# Altium PCB SwarmBots.PcbDoc
Units mm, origin at the board's own origin, x right, y up, seen from the top; angles counter-clockwise.
Board outline 23.94 x 24 mm, 4 copper layers (Component Side, Ground Plane, Power Plane, Solder Side), stack 1.1 mm thick; 89 components, 69 nets, 340 pads, 81 vias.
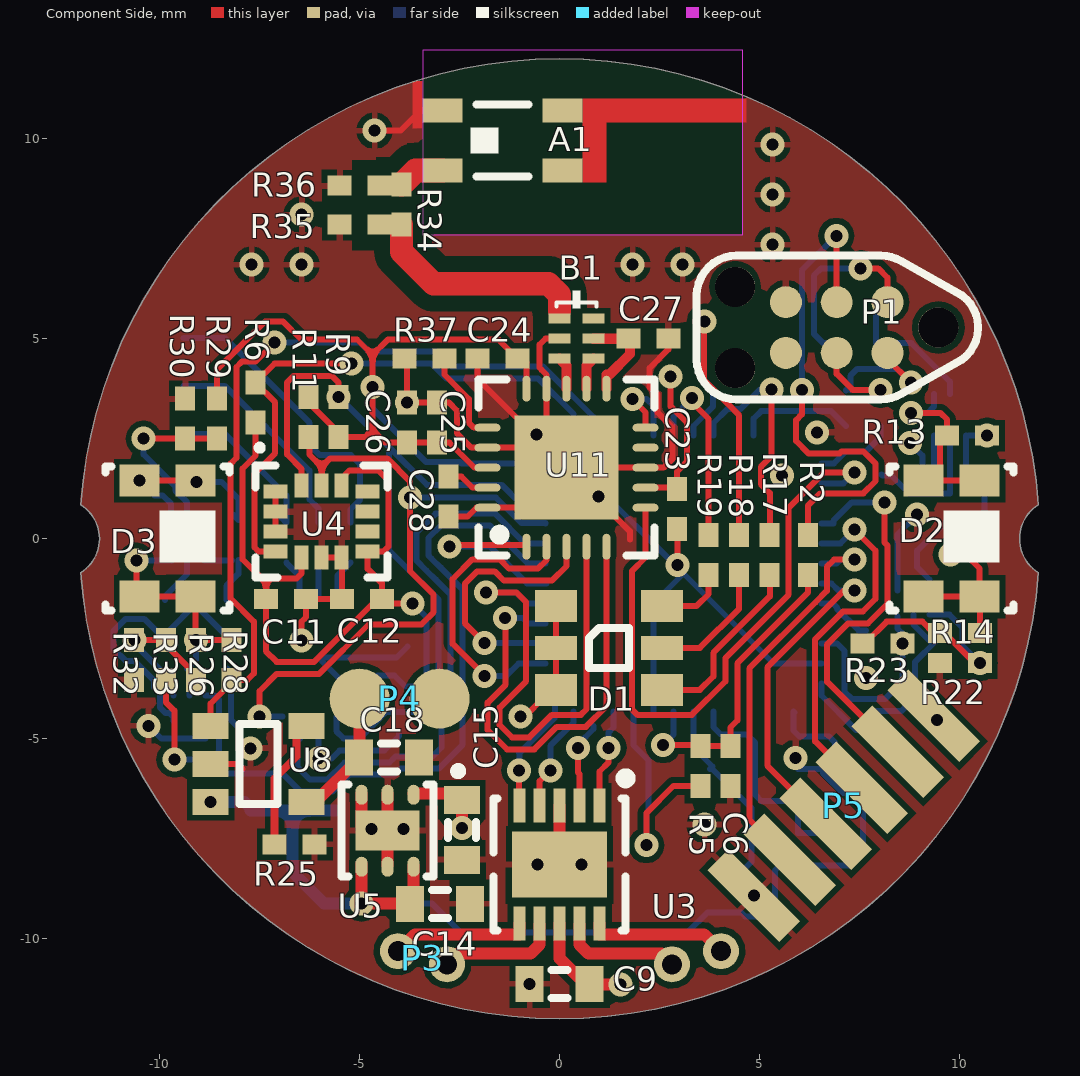
[diagram p0: Component Side view]
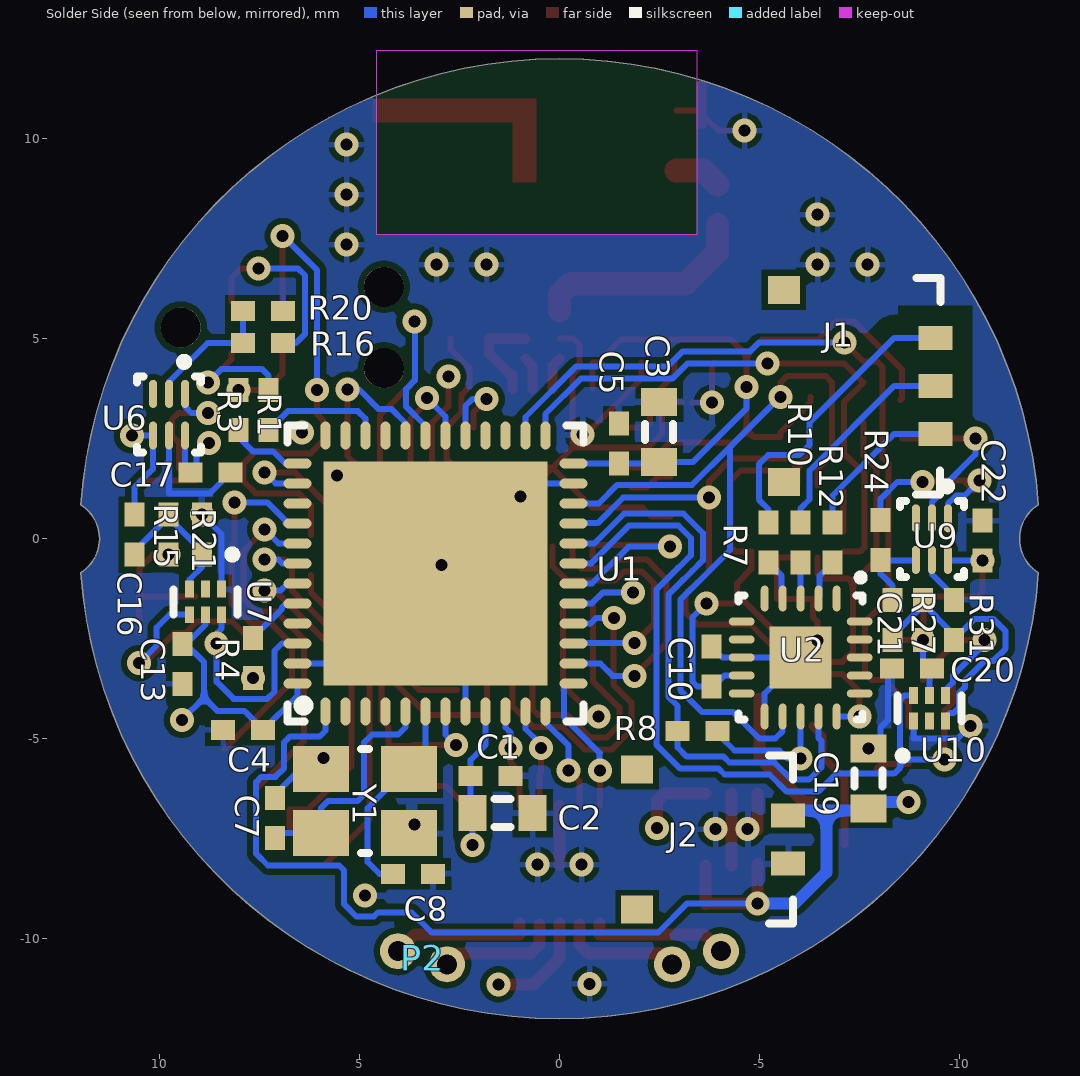
[diagram p1: Solder Side view, seen from below]
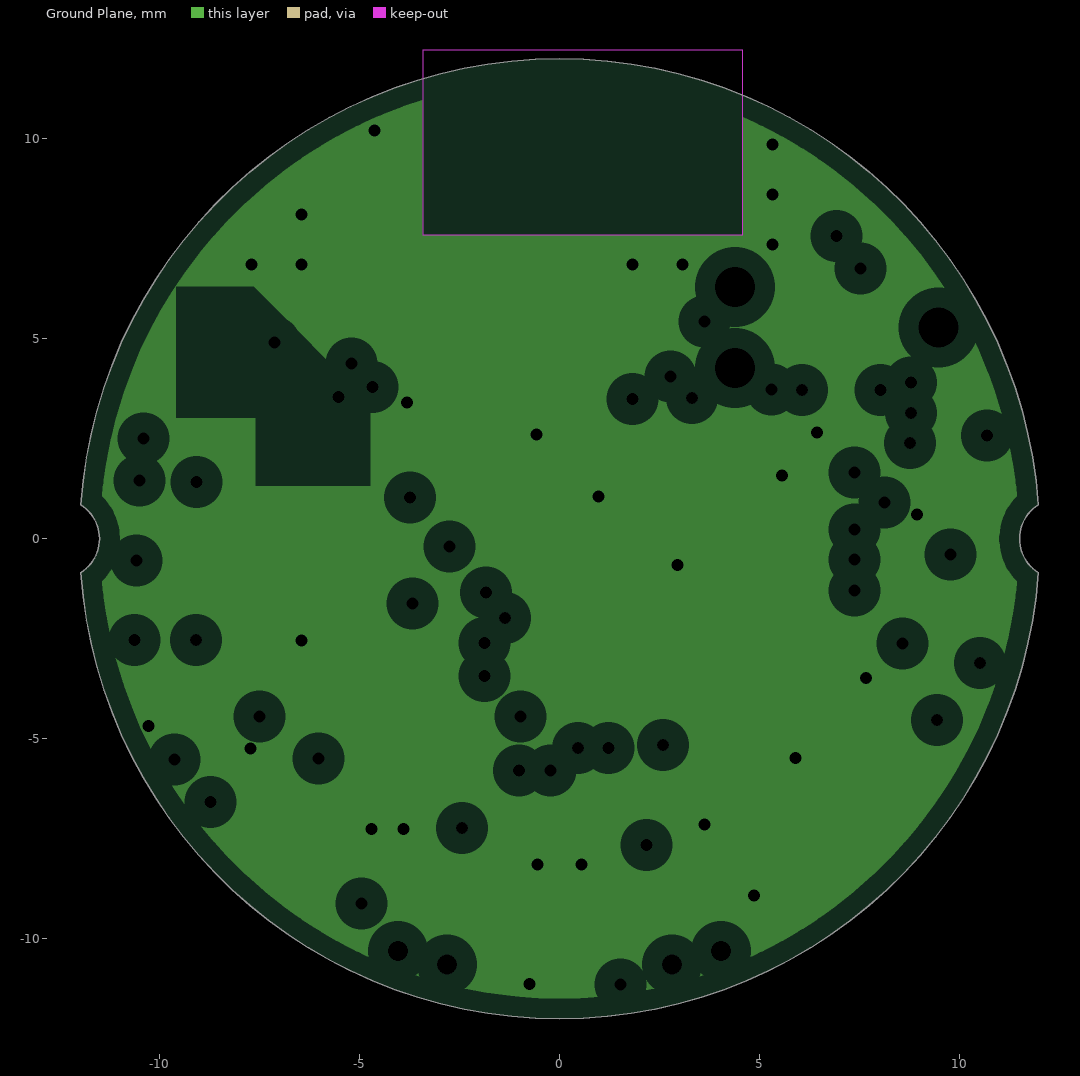
[diagram p2: Ground Plane, clearances drawn from the general rule]
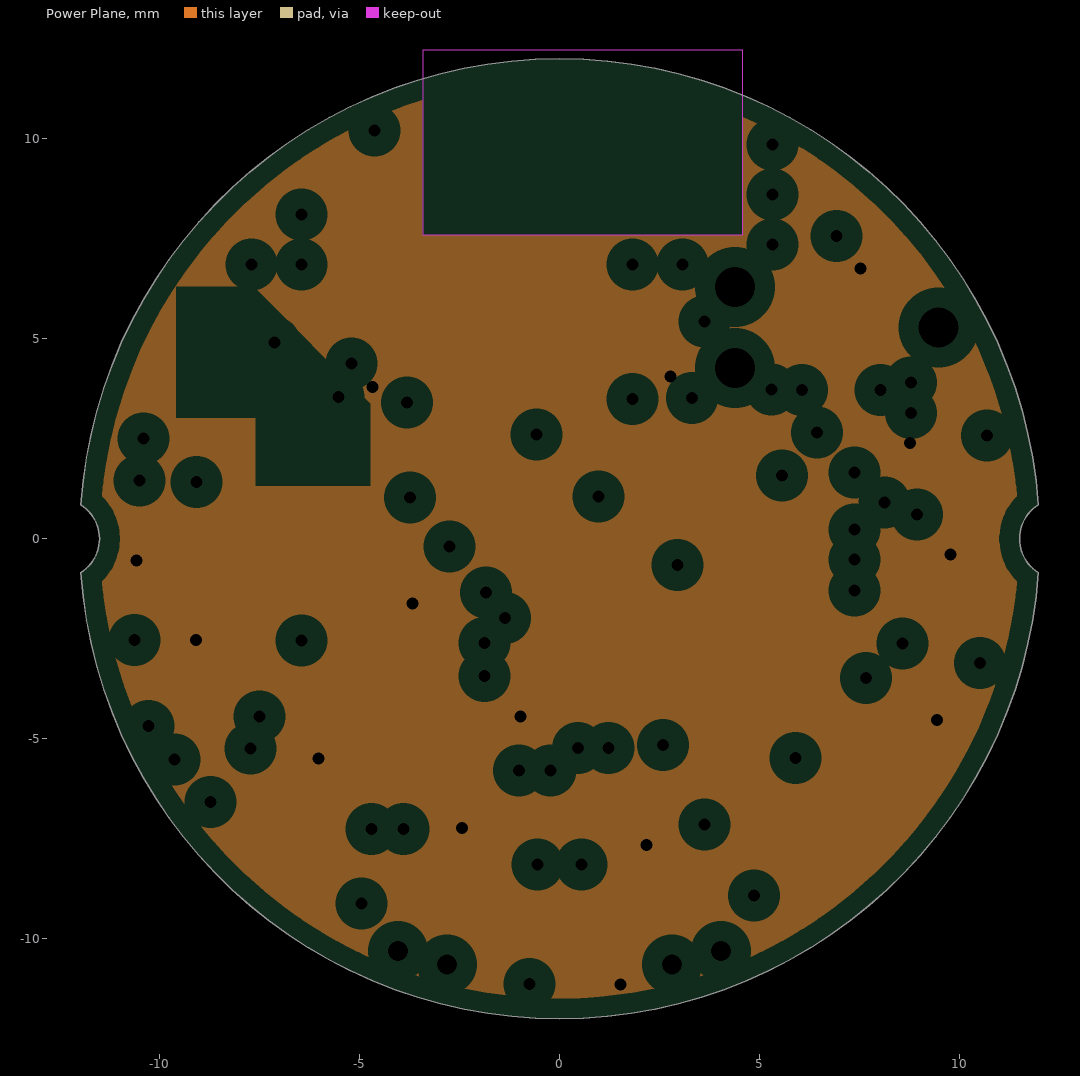
[diagram p3: Power Plane, clearances drawn from the general rule]

## Layer stack, top to bottom
Component Side: signal copper 0.035
Dielectric 1: prepreg 0.3, FR-4, Dk 4.2
Ground Plane: plane copper 0.035, net GND
Dielectric 3: prepreg 0.36, FR-4, Dk 4.2
Power Plane: plane copper 0.035, net +3.3V
Dielectric 4: prepreg 0.3, FR-4, Dk 4.2
Solder Side: signal copper 0.035

## Board outline
-11.97,-0.848 ccw(c0,0) 11.97,-0.848 cw(c12.5,0) 11.97,0.848 ccw(c0,0) -11.97,0.848 cw(c-12.5,0)

## Design rules (kind name [scope] priority, off if disabled: settings)
Clearance Clearance_Antenna [InNet('NetA1_1') Or InNet('NetB1_1') vs isRegion] p1: gap=0.4
Clearance Clearance_Electrodes [InNetClass('Electrodes') vs IsRegion] p2: gap=0.5
Clearance [All] p3: gap=0.15
ComponentClearance [All] p1: gap=0.15 collisioncheckmode=3 verticalgap=0.254 showdistances=FALSE
DiffPairsRouting [All] p1: maxlimit=10 minlimit=0.125 mostfreqgap=0.15 toplayer_minwidth=0.381 toplayer_maxwidth=0.381 toplayer_prefwidth=0.381 bottomlayer_minwidth=0.381 bottomlayer_maxwidth=0.381 bottomlayer_prefwidth=0.381 maxuncoupledlength=12.7
FabricationTestPointUsage FabricationTestPointUsage_1 [All] p1: valid=0 allowmultiple=FALSE
FabricationTestpoint FabricationTestpoint_1 [All] p1: side=3 testpointundercomponent=TRUE minsize=1.016 maxsize=2.54 preferedsize=1.524 minholesize=0 maxholesize=1.016 preferedholesize=0.813 testpointgrid=0.025 allowsidetop=TRUE allowsidebottom=TRUE usegrid=TRUE gridtolerance=0
HoleSize [All] p1: absolutevalues=TRUE maxlimit=6 minlimit=0.2 maxpercent=80.000 minpercent=20.000
HoleSize FabricationTestpoint [All] p2 off: absolutevalues=TRUE maxlimit=2.54 minlimit=0.025 maxpercent=80.000 minpercent=20.000
HoleSize FabricationTestPointUsage [All] p3 off: absolutevalues=TRUE maxlimit=2.54 minlimit=0.025 maxpercent=80.000 minpercent=20.000
MinimumSolderMaskSliver [All] p1: minsoldermaskwidth=0.01
PlaneClearance [All] p1: clearance=0.5
PlaneConnect [All] p1: planeconnectstyle=Relief reliefexpansion=0.4 reliefentries=4 reliefconductorwidth=0.15 reliefairgap=0.15
PolygonConnect [All] p1: connectstyle=Relief reliefconductorwidth=0.15 reliefentries=4 polygonreliefangle="90 Angle" airgapwidth=0.15
RoutingCorners [All] p1: cornerstyle=45-Degree minsetback=1.25 maxsetback=1.25
RoutingVias [All] p1: holewidth=0.3 width=0.6 viastyle="Through Hole" minholewidth=0.3 minwidth=0.6 maxholewidth=0.3 maxwidth=0.6
SilkToBoardRegionClearance [All] p1 off:
SilkToSilkClearance [All] p1: silktosilkclearance=0.1
SilkToSolderMaskClearance [IsPad] p1: minsilkscreentomaskgap=0.1 clearancetoexposedcopper=TRUE
SolderMaskExpansion [All] p1: expansion=0.075
UnpouredPolygon [All] p1: allowunpoured=FALSE
Width [All] p1: maxlimit=1 minlimit=0.15 preferedwidth=0.2 minimp=50.000000 maximp=50.000000 favimp=50.000000
17 further rules are at their usual default settings.

## Classes and differential pairs
component class SBMicrocontroller: C1 C2 C3 C4 C5 C6 C7 C8 P1 R1 R2 R3 R4 R5 U1 Y1
component class SBPeripherals: C9 C10 C11 C12 C13 C14 C15 C16 C17 C18 C19 C20 C21 C22 D1 D2 D3 J1 J2 P2 P3 P4 P5 R6 R7 R8 R9 R10 R11 R12 R13 R14 R15 R16 R17 R18 R19 R20 R21 R22 R23 R24 R25 R26 R27 R28 R29 R30 R31 R32 R33 U2 U3 U4 U5 U6 U7 U8 U9 U10
component class SBRadio: A1 B1 C18 C23 C24 C25 C26 C27 C28 J3 R34 R35 R36 R37 U11
net class Electrodes: NetJ1_1 NetJ1_2 NetJ1_3 NetR7_1 NetR10_1 NetR12_1 NetU5_16
net class MOTOR_CONTROL[1..4]: MOTOR_CONTROL1 MOTOR_CONTROL2 MOTOR_CONTROL3 MOTOR_CONTROL4
net class RGBLED[1..3]: RGBLED1 RGBLED2 RGBLED3

## Components (designator, comment, footprint, x,y, rotation, side; value= is the part's Value field where it differs from the comment)
A1 "2450AT18D0100" 2450AT18D0100 -1.425,9.95 r0 top
B1 "2450BM14A0002T" 2450BM14A0002 0.425,5 r90 top
C1 "10nF" 0402 1.72,-5.93 r0 bottom
C2 "1uF" 0603 1.42,-6.86 r0 bottom
C3 "4.7uF" 0603 -2.49,2.67 r270 bottom
C4 "100nF" 0402 7.91,-4.78 r180 bottom
C5 "100nF" 0402 -1.485,2.375 r270 bottom
C6 "100nF" 0402 4.27,-5.68 r90 top
C7 "22pF" 0402 7.11,-6.98 r270 bottom
C8 "22pF" 0402 3.66,-8.38 r0 bottom
C9 "10uF" 0603 0,-11.13 r0 top
C10 "100nF" 0402 -3.8,-3.2 r270 bottom
C11 "100nF" 0402 -6.835,-1.51 r180 top
C12 "100nF" 0402 -4.94,-1.51 r0 top
C13 "10nF" 0402 9.43,-3.13 r90 bottom
C14 "1uF" 0603 -2.99,-9.13 r180 top
C15 "1uF" 0603 -2.44,-7.28 r90 top
C16 "1nF" 0402 10.62,0.1 r270 bottom
C17 "10nF" 0402 8.73,1.66 r0 bottom
C18 "4.7uF" 0603 -4.26,-5.47 r180 top
C19 "4.7uF" 0603 -7.72,-5.99 r270 bottom
C20 "10nF" 0402 -8.81,-3.25 r180 bottom
C21 "1nF" 0402 -8.33,-2.03 r270 bottom
C22 "10nF" 0402 -10.58,-0.05 r270 bottom
C23 "100nF" 0402 2.94,0.74 r90 top
C24 "100nF" 0402 -1.55,4.5 r0 top
C25 "10nF" 0402 -3.06,2.9 r270 top
C26 "1nF" 0402 -3.81,2.9 r270 top
C27 "2.2nF" 0402 2.22,5 r180 top
C28 "33nF" 0402 -2.77,1.05 r90 top
D1 "SMLVN6RGB1W1" "3.5X2.8 MM 6-SMD" 1.24,-2.73 r0 top
D2 "PD15-22C/TR8" PD15-22C/TR8 9.8,0 r270 top
D3 "PD15-22C/TR8" PD15-22C/TR8 -9.8,0 r270 top
J1 "78171-0003" 78171-0003 -7.51,3.82 r270 bottom
J2 "78171-0002" 78171-0002 -3.83,-7.52 r270 bottom
P1 "TC2030-IDC-NL" TC2030-IDC-NL 6.93,5.28 r180 top
P2 "HEADER 2X1 0.05\" UNPOLARIZED" "HEADER 2X1 0.05\" - UNPOLARIZED" 3.425,-10.475 r15 bottom
P3 "HEADER 2X1 0.05\" UNPOLARIZED" "HEADER 2X1 0.05\" - UNPOLARIZED" -3.425,-10.475 r165 top
P4 "CHARGING PAD" "CHARGING PAD" -4,-4 r0 top
P5 "EXTENSION_PORT" EXTENSION_PORT 9.35,-4.43 r225 top
R1 "22R" 0402 7.27,3.22 r90 bottom
R2 "22R" 0402 6.21,-0.41 r90 top
R3 "22R" 0402 8.03,3.22 r90 bottom
R4 "100K" 0402 7.66,-2.98 r90 bottom
R5 "100K" 0402 3.52,-5.68 r270 top
R6 "100K" 0402 -7.6,3.4 r270 top
R7 "10K" 0402 -5.23,-0.1 r90 bottom
R8 "100K" 0402 -3.45,-4.81 r180 bottom
R9 "10K" 0402 -5.53,3.04 r270 top
R10 "10K" 0402 -6.03,-0.1 r90 bottom
R11 "10K" 0402 -6.28,3.04 r90 top
R12 "10K" 0402 -6.83,-0.1 r90 bottom
R13 "390K" 0402 10.19,2.58 r0 top
R14 "100K" 0402 10.01,-2.36 r0 top
R15 "220K" 0402 9.78,0.1 r270 bottom
R16 "220K" 0402 7.41,4.89 r180 bottom
R17 "22.6R" 0402 5.25,-0.41 r270 top
R18 "130R" 0402 4.489,-0.41 r270 top
R19 "24.9R" 0402 3.725,-0.41 r270 top
R20 "1.5M" 0402 7.41,5.69 r0 bottom
R21 "220K" 0402 8.94,0.1 r270 bottom
R22 "100K" 0402 10.01,-3.11 r0 top
R23 "680K" 0402 8.08,-2.62 r180 top
R24 "390K" 0402 -8.03,-0.03 r270 bottom
R25 "10K" 0402 -6.62,-7.64 r0 top
R26 "100K" 0402 -9.09,-3.03 r90 top
R27 "220K" 0402 -9.09,-2.03 r270 bottom
R28 "100K" 0402 -8.2,-3.03 r90 top
R29 "220K" 0402 -8.56,3 r90 top
R30 "1.5M" 0402 -9.36,3 r270 top
R31 "220K" 0402 -9.86,-2.03 r270 bottom
R32 "100K" 0402 -10.64,-3.03 r90 top
R33 "680K" 0402 -9.84,-3.03 r90 top
R34 "0R" 0402 -3.95,8.35 r90 top
R35 "0402-NC" "0402 - NOBODY" -5,7.85 r0 top
R36 "0402-NC" "0402 - NOBODY" -5,8.825 r0 top
R37 "22K 0402 1/16W ±1%" 0402 -3.37,4.5 r0 top
U1 "STM32F051C8U6" QFN50P700X700X60_HS-49L 3.1,-0.87 r90 bottom locked
U2 "AT42QT1070-MMH" QFN45P300X300X85_HS-21L -6.03,-2.97 r270 bottom
U3 "A3901SEJTR-T" DFN50P300X300X75_HS-11N 0,-8.15 r180 top
U4 "LSM6DS3" "LGA-14 2.5X3X0.86 MM 14L" -5.945,0.425 r0 top
U5 "ADP122ACPZ-3.3-R7" "LFCSP-6 2.0X2.0X0.55" -4.3,-7.3 r180 top
U6 "TSV991AIQ1T" DFN6-1.3x1.6x0.55 9.76,3.1 r0 bottom
U7 "NCS2200AMUT1G" UDFN6-1.2x1.0 8.85,-1.58 r0 bottom
U8 "MCP73831T-2ACI/OT" SOT-23-OT5_L -7.52,-5.63 r0 top
U9 "TSV991AIQ1T" DFN6-1.3x1.6x0.55 -9.31,-0.01 r0 bottom
U10 "NCS2200AMUT1G" UDFN6-1.2x1.0 -9.25,-4.24 r180 bottom
U11 "nRF24L01+" QFN50P400X400X95_HS-21L 0.175,1.775 r90 top
Y1 "7V-16.000MAAE-T" "3.2X2.5 CRYSTAL" 4.86,-6.56 r180 bottom

## Footprints (in the part's own frame and the unit in brackets; to place one, negate y for a bottom-side part, rotate by r counter-clockwise, add the part's x,y. Pads: shape width x height; smd on the part's side, far side on the other; paste and mask are expansions set on the pad)
"3.2X2.5 CRYSTAL" [mm]
  rect 1.4x1.15 smd: 1(-1.1,-0.8) 2(1.1,-0.8) 3(1.1,0.8) 4(-1.1,0.8)
  silkscreen extent -0.1,-1.3 0.1,1.3, body extent -1.6,-1.25 1.6,1.25, height 0.8
"3.5X2.8 MM 6-SMD" [mm] "3.5 x 2.8 mm 6-SMD Flat Leads"
  rect 1.05x0.8 smd: 1(-1.325,1.05) 3(-1.325,-1.05) 4(1.325,-1.05) 6(1.325,1.05)
  rect 1.05x0.6 smd: 2(-1.325,0) 5(1.325,0)
  silkscreen extent -0.5,-0.5 0.5,0.5, body extent -1.75,-1.4 1.75,1.4, height 0.6
0402 [mm] "Chip Body 1.0 x 0.5 mm (LxW typ)"
  rect 0.6x0.5 smd: 1(-0.5,0) 2(0.5,0)
  body extent -0.55,-0.3 0.55,0.3, height 0.55
"0402 - NOBODY" [mm] "Chip Body 1.0 x 0.5 mm (LxW typ)"
  rect 0.6x0.5 smd: 1(-0.5,0) 2(0.5,0)
  body extent -0.55,-0.3 0.55,0.3, height 0
0603 [mm] "Chip Body 1.6 x 0.8 mm (LxW typ)"
  rect 0.7x0.9 smd: 1(-0.75,0) 2(0.75,0)
  silkscreen extent -0.2,-0.35 0.2,0.35, body extent -0.85,-0.48 0.85,0.48, height 0.9
2450AT18D0100 [mm] "ANTENNA CHIP 2.4GHZ"
  rect 1x0.6 smd: 1(-1.5,-0.75) 2(-1.5,0.75) 2(1.5,-0.75) 2(1.5,0.75)
  silkscreen extent -0.8,-0.9 0.65,0.9, body extent -1.6,-0.8 1.6,0.8, height 1.3
2450BM14A0002 [mm] "2.45 GHz Impedance Matched Balun-Filter: Optimized for Nordic's Chipset nRF24L01"
  rect 0.25x0.55 smd: 1(0.5,0.425) 2(0,0.425) 3(-0.5,0.425) 4(-0.5,-0.425) 5(0,-0.425) 6(0.5,-0.425)
  silkscreen extent 0.75,-0.5 1.2,0.5, body extent -0.8,-0.4 0.8,0.4, height 0.6
78171-0002 [mm]
  rect 0.6x0.85 smd: 1(-0.6,1.888) 2(0.6,1.888)
  rect 0.7x0.8 smd: 3(-1.75,-1.887) 4(1.75,-1.887)
  silkscreen extent -2.1,1.41 2.1,2.01, body extent -2.1,-2.51 2.1,2.02, height 1.45
78171-0003 [mm]
  rect 0.6x0.85 smd: 1(-1.2,1.888) 2(0,1.888) 3(1.2,1.888)
  rect 0.7x0.8 smd: 4(-2.4,-1.9) 5(2.4,-1.9)
  silkscreen extent -2.7,1.4 2.71,2.01, body extent -2.7,-2.5 2.7,2.03, height 1.46
"CHARGING PAD" [mm]
  round 1.5 smd paste-5: 1(-1,0) 2(1,0)
  body extent -1.74,-0.75 1.75,0.75, height 0
DFN6-1.3x1.6x0.55 [mm]
  oval 0.2x0.7 smd: 1(-0.4,-0.52) 2(0,-0.52) 3(0.4,-0.52) 4(0.4,0.52) 5(0,0.52) 6(-0.4,0.52)
  silkscreen extent -0.8,-1.42 0.8,0.95, body extent -0.65,-0.8 0.65,0.8, height 0.55
DFN50P300X300X75_HS-11N [mm]
  rect 0.3x0.85 smd: 1(-1,-1.475) 2(-0.5,-1.475) 3(0,-1.475) 4(0.5,-1.475) 5(1,-1.475) 6(1,1.475) 7(0.5,1.475) 8(0,1.475) 9(-0.5,1.475) 10(-1,1.475)
  rect 2.38x1.65 smd: 11(0,0)
  silkscreen extent -1.78,-2.28 1.65,1.65, body extent -1.5,-1.5 1.5,1.5, height 0.75
EXTENSION_PORT [mil]
  rect 29x100 smd paste-78.74: 1(0,0) 2(50,0) 3(100,0) 4(150,0) 5(200,0) 6(250,0)
  body extent -15,-45 265,45, height 0
"HEADER 2X1 0.05\" - UNPOLARIZED" [mm]
  round 0.9 hole 0.5: 1(0.635,0) 2(-0.635,0)
  body extent -1.25,-0.6 1.25,0.6, height 0.01
"LFCSP-6 2.0X2.0X0.55" [mm] ". 6-Lead Lead Frame Chip Scale Package [LFCSP_UD]  2.00 mm× 2.00 mm Body, Ultra Thin, Dual Lead  (CP-6-3)"
  oval 0.3x0.5 smd: 1(-0.65,-0.9) 2(0,-0.9) 3(0.65,-0.9) 4(0.65,0.9) 5(0,0.9) 6(-0.65,0.9)
  rect 1.6x1 smd: 7(0,0)
  silkscreen extent -1.87,-1.59 1.15,1.15, body extent -1,-1 1,1, height 0.6
"LGA-14 2.5X3X0.86 MM 14L" [mm] "LGA, 14-Leads, Body 3.00x2.50mm, Pitch 0.50mm, IPC High Density"
  rect 0.6x0.35 smd: 1(-1.15,0.75) 2(-1.15,0.25) 3(-1.15,-0.25) 4(-1.15,-0.75) 8(1.15,-0.75) 9(1.15,-0.25) 10(1.15,0.25) 11(1.15,0.75)
  rect 0.35x0.6 smd: 5(-0.5,-0.9) 6(0,-0.9) 7(0.5,-0.9) 12(0.5,0.9) 13(0,0.9) 14(-0.5,0.9)
  silkscreen extent -1.65,-1.4 1.65,1.9, body extent -1.5,-1.25 1.5,1.25, height 0.86
PD15-22C/TR8 [mm] "Silicon PIN Photodiode"
  rect 0.8x1 smd: 1(-1.45,0.7) 1(-1.45,-0.7) 2(1.45,0.7) 2(1.45,-0.7)
  silkscreen extent -1.8,-1.55 1.8,1.55, body extent -1.65,-1.4 1.65,1.4, height 1.1
QFN45P300X300X85_HS-21L [mm] "QFN, 20-Leads, Body 3.00x3.00mm, Pitch 0.45mm, Thermal Pad 1.55x1.55mm, IPC High Density"
  oval 0.65x0.2 smd: 1(-1.475,0.9) 2(-1.475,0.45) 3(-1.475,0) 4(-1.475,-0.45) 5(-1.475,-0.9) 11(1.475,-0.9) 12(1.475,-0.45) 13(1.475,0) 14(1.475,0.45) 15(1.475,0.9)
  oval 0.2x0.65 smd: 6(-0.9,-1.475) 7(-0.45,-1.475) 8(0,-1.475) 9(0.45,-1.475) 10(0.9,-1.475) 16(0.9,1.475) 17(0.45,1.475) 18(0,1.475) 19(-0.45,1.475) 20(-0.9,1.475)
  rect 1.55x1.55 smd: 21(0,0)
  silkscreen extent -2.07,-1.55 1.55,1.57, body extent -1.55,-1.55 1.55,1.55, height 0.85
QFN50P400X400X95_HS-21L [mm] "QFN, 20-Leads, Body 4,00x4,00mm, Pitch 0,50mm, Thermal Pad 2,60x2,60mm, IPC High Density"
  oval 0.65x0.2 smd: 1(-1.975,1) 2(-1.975,0.5) 3(-1.975,0) 4(-1.975,-0.5) 5(-1.975,-1) 11(1.975,-1) 12(1.975,-0.5) 13(1.975,0) 14(1.975,0.5) 15(1.975,1)
  oval 0.2x0.65 smd: 6(-1,-1.975) 7(-0.5,-1.975) 8(0,-1.975) 9(0.5,-1.975) 10(1,-1.975) 16(1,1.975) 17(0.5,1.975) 18(0,1.975) 19(-0.5,1.975) 20(-1,1.975)
  rect 2.6x2.6 smd: 21(0,0)
  silkscreen extent -2.2,-2.2 2.2,2.2, body extent -2.05,-2.05 2.05,2.05, height 0.95
QFN50P700X700X60_HS-49L [mm] "QFN, 48-Leads, Body 7,00x7,00mm, Pitch 0,50mm, Thermal Pad 5,60x5,60mm, IPC High Density"
  oval 0.7x0.25 smd: 1(-3.45,2.75) 2(-3.45,2.25) 3(-3.45,1.75) 4(-3.45,1.25) 5(-3.45,0.75) 6(-3.45,0.25) 7(-3.45,-0.25) 8(-3.45,-0.75) 9(-3.45,-1.25) 10(-3.45,-1.75) 11(-3.45,-2.25) 12(-3.45,-2.75) 25(3.45,-2.75) 26(3.45,-2.25) 27(3.45,-1.75) 28(3.45,-1.25) 29(3.45,-0.75) 30(3.45,-0.25) 31(3.45,0.25) 32(3.45,0.75) 33(3.45,1.25) 34(3.45,1.75) 35(3.45,2.25) 36(3.45,2.75)
  oval 0.25x0.7 smd: 13(-2.75,-3.45) 14(-2.25,-3.45) 15(-1.75,-3.45) 16(-1.25,-3.45) 17(-0.75,-3.45) 18(-0.25,-3.45) 19(0.25,-3.45) 20(0.75,-3.45) 21(1.25,-3.45) 22(1.75,-3.45) 23(2.25,-3.45) 24(2.75,-3.45) 37(2.75,3.45) 38(2.25,3.45) 39(1.75,3.45) 40(1.25,3.45) 41(0.75,3.45) 42(0.25,3.45) 43(-0.25,3.45) 44(-0.75,3.45) 45(-1.25,3.45) 46(-1.75,3.45) 47(-2.25,3.45) 48(-2.75,3.45)
  rect 5.6x5.6 smd: 49(0,0)
  silkscreen extent -3.7,-3.7 3.7,3.7, body extent -3.55,-3.55 3.55,3.55, height 0.6
SOT-23-OT5_L [mm] "SOT23, 5-Leads, Body 2.9x1.6mm, Pitch 0.95mm, Lead Span 2.7mm, IPC High Density"
  rect 0.9x0.65 smd: 1(-1.2,0.95) 2(-1.2,0) 3(-1.2,-0.95) 4(1.2,-0.95) 5(1.2,0.95)
  silkscreen extent -0.48,-1 0.48,1, body extent -0.9,-1.55 0.9,1.55, height 1.45
TC2030-IDC-NL [mm] "TagConnector TC2030-IDC-NL"
  round 0.8 smd paste-1: 1(-1.27,-0.635) 2(-1.27,0.635) 3(0,-0.635) 4(0,0.635) 5(1.27,-0.635) 6(1.27,0.635)
  round 1 hole 1 unplated mask+0: ""(-2.54,0) ""(2.54,-1.016) ""(2.54,1.016)
  Component Side pour cut-out: -1.27,-0.085 -1.27,0.085 -1.06,0.127 -0.881,0.246 -0.762,0.425 -0.72,0.635 -0.72,0.635 -0.55,0.635 -0.496,0.396 -0.343,0.205 -0.122,0.099 0.122,0.099 0.343,0.205 0.496,0.396 0.55,0.635 0.55,0.635 0.72,0.635 0.762,0.425 0.881,0.246 1.06,0.127 1.27,0.085 1.27,0.085 1.27,-0.085 1.06,-0.127 0.881,-0.246 0.762,-0.425 0.72,-0.635 0.72,-0.635 0.55,-0.635 0.496,-0.396 0.343,-0.205 0.122,-0.099 -0.122,-0.099 -0.343,-0.205 -0.496,-0.396 -0.55,-0.635 -0.55,-0.635 -0.72,-0.635 -0.762,-0.425 -0.881,-0.246 -1.06,-0.127 -1.27,-0.085
  silkscreen extent -3.54,-1.8 3.5,1.8, body extent -1.67,-1.03 1.67,1.03, height 0
UDFN6-1.2x1.0 [mm]
  rect 0.22x0.42 smd: 1(-0.4,-0.32) 2(0,-0.32) 3(0.4,-0.32) 4(0.4,0.32) 5(0,0.32) 6(-0.4,0.32)
  silkscreen extent -0.8,-1.28 0.81,0.32, body extent -0.6,-0.5 0.6,0.5, height 0.55

## Part data
A1: "JOHANSON TECHNOLOGY 2450AT18D0100  ANTENNA, CERAMIC, 2.45GHZ"
B1: "Johanson Technology Impedance Matched Balun Filter Integrated Passive for nRF24L01"
C1 C13 C17 C20 C22 C25: "10nF 0402 X7R 25V ±5%"
C2 C14 C15: "1uF 0603 X5R 10V ±10%"
C3 C18 C19: "4.7uF 0603 X5R 10V ±10%"
C4 C5 C6 C10 C11 C12 C23 C24: "100nF 0402 X7R 16V ±10%"
C7 C8: "22pF 0402 NP0/CG0 50V ±5%"
C9: "10uF 0603 X5R 6.3V ±20%"
C16 C21 C26: "1nF 0402 X7R 50V ±10%"
C27: "2.2nF 0402 X7R 50V ±10%"
C28: "33nF 0402 X7R 50V ±10%"
D1: "ROHM SMLVN6RGB1W1 LED Tri-Color Blue/Green/Red Chip LED 6-Pin 1411 T/RLED Tri-Color Blue/Green/Red Chip LED 6-Pin 1411"
D2 D3: "Everlight PD15-22C/TR8 Silicon PIN Photodiode"
J1: "Molex Pico-EZmate™ Wire-to-Board Header, 3 contacts"
J2: "Molex Pico-EZmate™ Wire-to-Board Header, 2 contacts"
P1: "TagConnect TC2030-IDC-NL SWD Programming Connector"
R1 R2 R3: "22R 0402 1/16W ±1%"
R4 R5 R6 R8 R14 R22 R26 R28 R32: "100K 0402 1/16W ±1%"
R7 R9 R10 R11 R12 R25: "10K 0402 1/16W ±1%"
R13 R24: "390K 0402 1/16W ±1%"
R15 R16 R21 R27 R29 R31: "220K 0402 1/16W ±1%"
R17: "22.6R 0402 1/16W ±0.05R"
R18: "130R 0402 1/16W ±0.05R"
R19: "24.9R 0402 1/16W ±0.05R"
R20 R30: "1.5M 0402 1/16W ±1%"
R23 R33: "680K 0402 1/16W ±1%"
R34: "0R 0402 1/16W ±0.05R"
R35 R36: "NOT CONNECTED"
R37: library part 22K
U1: "STMICROELECTRONICS  STM32F051C8U6  MCU 32BIT CORTEX-M0 48MHZ UFQFPN-48"
U2: "Atmel Seven-channel QTouch® Touch Sensor IC"
U3: "ALLEGRO MICROSYSTEMS - A3901SEJTR-T - IC, MOTOR DRIVER"
U4: "STMicroelectronics iNEMO inertial module:   3D accelerometer and 3D gyroscope"
U5: "Analog Devices ADP122ACPZ-3.3-R7 - 5.5 V Input, 300 mA, Low Quiescent  Current, CMOS Linear Regulator"
U6 U9: "ST TSV991AIQ1T Rail-to-rail input/output 20 MHz GBP opamp"
U7 U10: "Low Voltage Comparator"
U8: "Miniature Single-Cell, Fully Integrated Li-Ion, Li-Polymer Charge Management Controller, 4.2V, 5-Pin SOT-23, Industrial Temperature, Tape and Reel"
U11: "Nordic Semi Ultra low power 2.4GHz RF Transceiver IC"
Y1: "TXC - 7V-16.000MAAE-T, 16MHZ, 30PPM, 12PF - CRYSTAL"

## Via types
v1: diameter 0.6, hole 0.3, Component Side to Solder Side, tented both sides, 77 vias
v2: diameter 0.6, hole 0.3, Component Side to Solder Side, 4 vias

## Nets (pads, with @x,y where several pads share a name; then routed paths per layer and width w, separated by ;. In a path a pad name is that pad's centre, name@x,y a point inside that pad or via, vN(x,y) a via of type N, cw(c..) or ccw(c..) an arc to the next point about the centre after c; other vN are vias at no path point)
+3.3V: C1.2 C2.2 C3.2 C4.2 C5.2 C9.2 C10.2 C11.2 C12.2 C13.2 C15.2 C17.2 C20.2 C22.2 C23.2 C24.2 C25.2 C26.2 D1.1 D1.2 D1.3 D2.2 D3.2 P1.1 P5.1 R5.2 R6.2 R8.2 R9.2 R11.2 R14.2 R15.2 R16.2 R26.2 R27.2 R28.2 R29.2 U1.9 U1.24 U1.48 U2.9 U2.13 U3.8 U4.5 U4.8 U4.12 U5.1 U6.6 U7.5 U9.6 U10.5 U11.7 U11.15 U11.18 | length 89.1
  Component Side w0.15: v2(-10.58,-0.55) -10.58,-1.31 -10.47,-1.42 -10.5,-1.45 -9.1,-1.45 R26.2@-9.1,-2.24 ; R26.2@-9,-2.53 R28.2 ; R29.2@-8.53,3.47 R29.2 -8.56,4.232 -7.367,5.425 -6.908,5.425 -6.463,4.98 -5.063,4.98 -4.675,4.593 ; R6.2 -7.6,2.074 -7.92,1.754 -7.92,-0.52 -7.335,-1.105 ; -7.34,-2.32 -7.34,-2.81 -7.07,-3.08 -6.134,-3.08 -4.564,-1.51 C12.2 ; -7.335,-2.32 C11.2 -7.335,-1.105 ; U4.5 -6.445,-0.865 -6.57,-0.99 -7.22,-0.99 -7.335,-1.105 ; R11.2 -6.28,3.408 -5.53,2.658 R9.2 -4.86,2.54 -4.68,2.72 ; U4.12 -5.445,1.515 -5.25,1.71 -4.537,1.71 -4.27,1.443 -4.27,-0.19 -4.405,-0.325 U4.8 -4.795,-0.755 -4.44,-1.11 C12.2 ; -4.675,4.568 -4.675,4.593 ; v1(-3.67,-1.62) -4.33,-1.62 C12.2 ; U11.18 -2.127,1.775 -2.752,2.4 C25.2 C26.2 -4.36,2.4 -4.68,2.72 ; C24.2@-1.05,4.4 -0.825,4.4 U11.15 ; C24.2 -1.525,4.975 -2.443,4.975 -3.482,4.975 -4.293,4.975 -4.675,4.593 ; v1(-0.97,-4.44) -1.02,-4.44 -1.14,-4.56 -1.06,-4.64 -0.2,-3.78 D1.3 D1.2 D1.1 ; U11.7 2.905,1.275 C23.2 2.94,1.686 3.183,1.928 3.183,2.905 2.78,3.308 v1(2.78,4.051) ; v1(2.17,-7.66) 2.17,-6.86 2.85,-6.18 R5.2 R5.2@3.68,-6.18 ; v1(7.53,6.76) 7.965,6.76 8.2,6.525 P1.1@8.2,5.925 ; D2.2@9.1,-1.45 D2.2@10.5,-1.45 ; v1(9.78,-0.4) 10.16,-0.4 10.5,-0.74 D2.2@10.5,-1.45 ; R14.2 10.51,-1.46 D2.2@10.5,-1.45 ; -4.68,2.72 v1(-4.68,3.79) -4.675,3.795 -4.675,4.593
  Component Side w0.3: U5.1@-3.65,-6.365 -2.625,-6.365 -2.44,-6.55 v1(-2.44,-7.23) ; U3.8 0,-10.49 0.65,-11.14 v1(1.53,-11.14)
  Solder Side w0.15: v2(-10.58,-0.55) -9.73,-0.55 -9.72,-0.54 U9.6@-9.7,-0.56 ; U10.5 -9.25,-3.31 C20.2 -9.09,-3.03 v2(-9.09,-2.53) R27.2@-9.19,-2.63 ; v1@-6.03,-5.26 U2.13 ; v1(-6.02,-5.5) -5.702,-5.5 -5.497,-5.295 -4.374,-5.295 -4.01,-4.931 R8.2@-4.01,-4.81 ; v1(-4.68,3.79) -4.68,3.26 -3.34,1.92 C3.2 -2.445,1.875 C5.2 ; U2.9 -4.13,-3.42 -3.85,-3.7 C10.2 -3.45,-3.7 -3.32,-3.57 -3.32,-1.97 v1(-3.67,-1.62) ; C5.2@-1.6,1.88 U1.24 ; U1.9 1.85,-5.162 2.22,-5.532 C1.2 2.22,-6.81 C2.2 v1(2.17,-7.66) ; U1.48 6.55,-3.92 C4.2 7.885,-4.305 8.555,-4.305 8.885,-3.975 ; R16.2 6.59,4.89 6.36,5.12 6.36,6.58 6.54,6.76 v1(7.53,6.76) ; v1(8.76,2.39) 9.07,2.08 9.07,1.82 C17.2 9.36,1.79 U6.6 ; U7.5 8.85,-2.148 9.272,-2.57 C13.2@9.36,-2.57 ; C13.2@9.4,-2.57 8.885,-3.085 8.885,-3.975 ; v1(9.44,-4.53) 8.885,-3.975
ANT1: B1.4 U11.12 | length 0.8
  Component Side w0.254: U11.12 0.675,4.325 B1.4
ANT2: B1.3 U11.13 | length 0.8
  Component Side w0.254: B1.3 0.175,4.325 U11.13
CHARGING: R28.1 U1.26 U8.1 | length 20.4
  Component Side w0.15: U8.1 -8.72,-4.12 -8.2,-3.6 R28.1 -7.8,-3.53 -7.64,-3.37 -7.64,-2.073 -8.22,-1.493 -8.22,1.879 -8.075,2.024 -8.075,4.293 -7.943,4.425 -7.6,4.425 v1(-7.125,4.9)
  Solder Side w0.15: v1(-7.125,4.9) -4.983,4.9 -4.758,4.675 -3.071,4.675 -2.706,4.31 -0.416,4.31 0.85,3.044 U1.26
GND: A1.2 B1.2 C1.1 C2.1 C3.1 C4.1 C5.1 C6.1 C7.1 C8.1 C9.1 C10.1 C11.1 C12.1 C13.1 C14.1 C15.1 C17.1 C18.1 C19.1 C20.1 C22.1 C23.1 C24.1 C25.1 C26.1 C27.1 C28.1 J2.2 P1.5 P4.2 P5.6 R4.1 R20.1 R21.1 R22.1 R25.2 R30.1 R31.1 R32.1 R35.1 R36.1 R37.1 U1.8 U1.23 U1.47 U1.49 U2.8 U2.11 U2.21 U3.3 U3.11 U4.1 U4.2 U4.3 U4.6 U4.7 U5.2 U5.3 U5.5 U5.7 U6.5 U7.1 U8.2 U9.5 U10.1 U11.8 U11.14 U11.17 U11.20 U11.21 Y1.2 Y1.4 | length 66.5
  Component Side w0.15: U8.2 -8.05,-5.63 -7.92,-5.76 ; U4.3 U4.2 U4.1 ; v1(-6.45,-2.55) -6.45,-2.075 -6.335,-1.96 C11.1 C12.1 -5.44,-0.48 U4.7 U4.6 ; v1(-4.625,10.2) -3.975,10.2 -3.475,10.7 A1.2@-2.925,10.7 ; R37.1@-3.875,4.4 -3.81,4.335 v1(-3.81,3.4) -3.312,3.4 ; C25.1 -2.76,3.4 -2.565,3.205 -2.565,2.637 -2.203,2.275 U11.21@-0.325,2.275 ; C28.1 -2.3,0.55 -2.075,0.775 -0.825,0.775 U11.21 ; C24.1@-2.05,4.4 -2.05,4 U11.21@-0.325,2.275 ; B1.2 -0.35,5 -0.5,4.85 -0.5,4.282 -0.45,4.232 -0.45,4.22 -0.325,4.095 U11.21@-0.325,2.275 ; 1.76,-0.02 1.76,0.19 U11.21 ; C27.1 2.72,4.733 2.255,4.268 2.255,3.833 2.255,3.797 2.45,3.602 2.45,3.16 2.82,2.79 2.82,1.99 2.605,1.775 U11.21 ; v1(2.95,-0.66) C23.1@2.95,0.22 ; U11.21@-0.325,2.275 U11.21
  Component Side w0.3: U5.3@-4.95,-6.365 -4.95,-7.265 U5.7@-4.3,-7.265 ; U5.5@-4.3,-8.165 U5.7@-4.3,-7.265 ; U5.2@-4.3,-6.365 U5.7@-4.3,-7.265 ; U3.11 U3.3
  Solder Side w0.15: v1@-10.28,-4.668 -9.953,-4.995 -8.85,-4.995 U10.1 ; R31.1 -9.86,-1.432 -9.31,-0.882 U9.5 ; C20.1 -8.215,-3.345 -8.215,-4.527 -8.02,-4.722 -8.02,-5.3 -7.96,-5.24 v1(-7.72,-5.24) ; U2.11 -5.13,-3.87 U2.21 U2.8 -4.07,-2.97 C10.1 ; U1.23 0.85,1.38 U1.49@2.92,-0.69 ; U1.8 2.35,-1.62 U1.49 5.35,-3.12 U1.47 ; Y1.4 6.585,-5.76 6.585,-5.859 7.086,-6.36 C7.1@7.25,-6.36 ; R4.1@7.6,-3.34 7.6,-3.28 7.62,-3.26 7.66,-3.3 v1(7.66,-3.48) ; C17.1@8.05,1.61 8.075,1.585 8.287,1.585 8.737,1.135 9.76,1.135 U6.5 ; U7.1@8.45,-1.3 8.45,0.11 v1(8.94,0.6) R21.1@8.92,0.62
  other v1: -0.75,-11.13 4.86,-8.92 -4.7,-7.26 -3.9,-7.26 3.625,-7.15 5.9,-5.48 -10.28,-4.68 0.98,1.06 5.56,1.58 -0.575,2.6 6.44,2.66 -7.7,6.85 -6.45,6.85 1.825,6.85 3.075,6.85 5.325,7.35 -6.45,8.1 5.325,8.6 5.325,9.85
  other v2: -0.55,-8.15 0.55,-8.15
I2C.SCL: R11.1 U1.21 U2.15 U4.13 | length 17.5
  Component Side w0.15: v1(-7.5,-4.44) -7.5,-3.81 -7.07,-3.38 -6.01,-3.38 -4.775,-2.145 -3.453,-2.145 -3.145,-1.837 -3.145,-1.403 -3.74,-0.808 v1(-3.74,1.03) -3.74,1.44 -4.31,2.01 -5.73,2.01 -5.945,1.795 ; R11.1@-6.25,2.65 -6.25,2.1 -5.945,1.795 ; U4.13 -5.945,1.795
  Solder Side w0.15: v1(-7.5,-4.44) -7.495,-4.445 U2.15 ; v1(-3.74,1.03) -1.591,1.03 -0.952,0.39 -0.35,0.39 U1.21
I2C.SDA: R9.1 U1.22 U2.12 U4.14 | length 20.9
  Component Side w0.15: U4.14 -6.445,1.74 -6.81,2.105 -6.81,3.91 -6.65,4.07 -5.69,4.07 -5.53,3.91 R9.1
  Solder Side w0.15: U2.12 -5.58,-4.81 -5.395,-4.995 -4.995,-4.995 -4.475,-4.475 -4.475,-4.467 -4.343,-4.335 -3.567,-4.335 -3.02,-3.788 -3.02,-1.521 -3.216,-1.325 -3.223,-1.325 -3.453,-1.095 -4.265,-0.283 -4.265,2.285 -4.253,2.285 ; v1(-5.52,3.54) -5.508,3.54 -4.253,2.285 ; U1.22 -0.98,0.88 -1.445,1.345 -3.313,1.345 -4.253,2.285
I2C_EXT.SCL: P5.5 U1.42 | length 10.3
  Component Side w0.15: P5.5@5.848,-8.122 4.745,-7.019 4.745,-5.308 4.745,-3.242 6.394,-1.594 ; 6.395,-1.594 6.685,-1.303 6.685,-0.7 6.865,-0.52 v1(7.37,-0.52)
  Solder Side w0.15: U1.42 6.93,-0.62 7.03,-0.52 v1(7.37,-0.52)
I2C_EXT.SDA: P5.4 U1.43 | length 9.4
  Component Side w0.15: P5.4@6.388,-6.771 6.746,-6.771 6.746,-7.224 5.195,-5.673 5.195,-5.577 5.195,-3.217 7.122,-1.29 v1(7.37,-1.29) ; v1@7.37,-1.315 v1@7.445,-1.315
  Solder Side w0.15: U1.43 6.8,-1.12 6.98,-1.3 7.36,-1.3 v1(7.37,-1.29)
IMU_INT: R6.1 U1.25 U4.4 | length 14.3
  Component Side w0.15: U4.4 -7.515,-0.325 -7.62,-0.22 -7.62,1.63 -7.11,2.14 -7.11,3.41 R6.1 -7.125,4.375 -6.809,4.375 ; -6.809,4.375 v1(-5.2,4.375)
  Solder Side w0.15: v1(-5.2,4.375) -3.195,4.375 -2.83,4.01 -0.54,4.01 0.35,3.12 U1.25
IO1: P5.2 U1.40 | length 9.6
  Component Side w0.15: v1(8.13,0.91) 8.13,-0.1 8.195,-0.165 8.195,-1.632 7.712,-2.115 7.217,-2.115 6.692,-2.64 6.692,-3.578 P5.2@8.377,-5.263
  Solder Side w0.15: U1.40 6.845,0.38 6.845,0.447 7.308,0.91 v1(8.13,0.91)
IO2: P5.3 U1.41 | length 9
  Component Side w0.15: v1(7.37,0.23) 7.895,-0.295 7.895,-1.507 7.587,-1.815 7.093,-1.815 6.392,-2.516 6.392,-5.064 P5.3@7.564,-6.236
  Solder Side w0.15: U1.41 7.02,-0.12 v1(7.37,0.23)
MCU_X1_16MHZ: C7.2 U1.5 Y1.1 | length 6
  Solder Side w0.15: U1.5 3.85,-4.71 4.035,-4.895 4.685,-4.895 4.89,-5.1 4.89,-6.4 5.05,-6.56 5.79,-6.56 5.96,-6.73 Y1.1 C7.2@7.25,-7.36
MCU_X2_16MHZ: C8.2 U1.6 Y1.3 | length 5.3
  Solder Side w0.15: U1.6 3.35,-5.22 Y1.3@3.825,-5.695 ; Y1.3 3.826,-5.76 4.8,-6.734 4.8,-8.08 4.5,-8.38 C8.2@4.01,-8.38
MOTOR_CONTROL1: U1.10 U3.1 | length 2.5
  Component Side w0.15: U3.1 1,-5.82 1.23,-5.59 v1(1.23,-5.23)
  Solder Side w0.15: v1(1.23,-5.23) 1.23,-4.84 1.35,-4.72 U1.10
MOTOR_CONTROL2: U1.11 U3.2 | length 2.2
  Component Side w0.15: v1(0.46,-5.23) 0.46,-5.84 0.5,-5.88 U3.2
  Solder Side w0.15: v1@0.31,-5.22 v1@0.32,-5.23 ; v1(0.46,-5.23) 0.46,-5.197 0.515,-5.142 0.489,-5.116 0.85,-4.756 0.85,-4.68
MOTOR_CONTROL3: U1.12 U3.4 | length 2.7
  Component Side w0.15: U3.4 -0.5,-6.06 v1(-0.23,-5.79)
  Solder Side w0.15: v1(-0.23,-5.79) -0.23,-5.178 0.35,-4.598 U1.12
MOTOR_CONTROL4: U1.13 U3.5 | length 3.7
  Component Side w0.15: v1(-1.01,-5.79) -1.01,-6.665 U3.5
  Solder Side w0.15: v1(-1.01,-5.79) -1,-5.78 -1,-5.37 -1.01,-5.36 -0.11,-4.46 -0.11,-3.62 U1.13
NetA1_1: A1.1 R34.2 R36.2 | length 1.2
  Component Side w0.6: R34.2 -3.6,9.2 A1.1
NetB1_1: B1.1 R34.1 R35.2 | length 5.5
  Component Side w0.582: R34.1 -3.95,7.175 -3.15,6.375 -0.275,6.375 0,6.1 0,5.7
NetC16_1: C16.1 R13.2 U6.4 | length 2.6
  Solder Side w0.15: U6.4 10.16,1.75 10.255,1.655 10.63,1.28 10.63,0.61 C16.1 ; U6.4@10.22,2.58 v1(10.69,2.58)
NetC16_2: C16.2 R15.1 R21.2 U7.3 | length 3.5
  Solder Side w0.15: U7.3 9.25,-1.02 8.94,-0.71 R21.2 8.94,-0.3 R15.1@9.78,0.54 ; R15.1 R15.1@9.78,0.54 ; C16.2@10.62,-0.3 R15.1@9.78,0.54
NetC18_2: C18.2 P4.1 U8.4 | length 3.3
  Component Side w0.3: U8.4 -6.1,-6.58 -5.01,-5.49 -5,-5.48 P4.1
NetC21_1: C21.1 R24.2 U9.4 | length 1.8
  Solder Side w0.15: U9.4@-8.87,-0.55 R24.2@-8.19,-0.55 ; C21.1 -8.33,-1.18 -8.03,-0.88 R24.2
NetC21_2: C21.2 R27.1 R31.2 U10.3 | length 6.9
  Solder Side w0.15: R31.2 -10.385,-2.005 -10.847,-2.005 -11.155,-2.313 -11.155,-2.747 -10.847,-3.055 -10.627,-3.055 -10.135,-3.547 -10.135,-3.717 -9.985,-3.867 -9.985,-4.223 -9.853,-4.355 -9.763,-4.355 -9.65,-4.468 U10.3 ; R31.2@-9.85,-2.32 -9.782,-2.32 R27.1@-9.09,-1.628 ; R27.1 R27.1@-9.09,-1.628 ; C21.2@-8.34,-2.43 -8.34,-2.412 -9.09,-1.662 R27.1@-9.09,-1.628
NetC28_2: C28.2 U11.19 | length 1.1
  Component Side w0.15: C28.2 -2.45,1.55 -2.175,1.275 U11.19
NetD1_4: D1.4 R17.2 | length 4.4
  Component Side w0.15: D1.4 3.51,-3.78 3.845,-3.445 3.845,-2.855 5.26,-1.44 R17.2@5.26,-1.01
NetD1_5: D1.5 R18.2 | length 3.1
  Component Side w0.15: D1.5 3.51,-2.73 4.489,-1.751 R18.2@4.489,-1.01
NetD1_6: D1.6 R19.2 | length 1.7
  Component Side w0.15: D1.6 3.43,-1.68 3.725,-1.385 R19.2@3.725,-1.01
NetD2_1: D2.1 R13.1 U6.1 | length 5.2
  Component Side w0.15: v1(8.79,3.14) 9.53,3.14 9.69,2.98 R13.1 9.51,2.4 9.51,1.75 9.4,1.75 9.1,1.45 D2.1@10.5,1.45
  Solder Side w0.15: v1(8.79,3.14) 9.2,3.14 9.36,3.3 U6.1
NetD3_1: D3.1 R24.1 U9.1 | length 4.9
  Component Side w0.15: v1(-10.5,1.45) D3.1@-10.1,1.45 ; D3.1@-10.35,1.2 D3.1@-10.1,1.45 ; D3.1@-9.3,1.45 D3.1@-10.1,1.45
  Solder Side w0.15: v1(-10.5,1.45) -10.13,1.08 -9.92,1.08 -9.71,0.87 U9.1 ; v1(-9.08,1.42) -8.45,1.42 -8.03,1 R24.1 R24.1@-8.17,0.61
NetJ1_1: J1.1 R7.2 | length 7.6
  Solder Side w0.15: J1.1 -8.37,5.02 -6.245,2.895 -6.245,2.34 -5.995,2.09 -5.212,2.09 -4.985,1.863 -4.985,0.977 -5.23,0.732 R7.2
NetJ1_2: J1.2 R10.2 | length 5.4
  Solder Side w0.15: J1.2 -8.37,3.82 -6.25,1.7 -6.25,0.98 -6.03,0.76 R10.2
NetJ1_3: J1.3 R12.2 | length 4.1
  Solder Side w0.15: J1.3 -8.37,2.62 -6.83,1.08 R12.2 R12.2@-6.95,0.52
NetP1_2: P1.2 R1.2 | length 3.1
  Component Side w0.15: P1.2 8.2,4.49 v1(8.79,3.9)
  Solder Side w0.15: R1.2@7.16,3.7 R1.2@7.16,3.72 ; R1.2 7.27,4.07 7.445,4.245 8.445,4.245 v1(8.79,3.9)
NetP1_3: P1.3 R2.2 | length 12.6
  Component Side w0.15: v1(6.06,3.72) 6.06,3.14 6.06,3.11 5.915,2.965 5.915,2.443 6.223,2.135 7.003,2.135 7.053,2.185 7.597,2.185 7.905,1.877 7.905,1.443 7.597,1.135 6.519,1.135 6.21,0.826 R2.2 ; v1(6.92,7.57) 6.92,5.925 P1.3
  Solder Side w0.15: v1(6.06,3.72) 6.06,6.71 v1(6.92,7.57)
NetP1_4: P1.4 R3.2 | length 1.8
  Component Side w0.15: P1.4 6.93,4.12 7.33,3.72 v1(8.03,3.72)
NetP2_1: P2.1 U3.10 | length 3.5
  Component Side w0.3: U3.10 1,-9.889 3.617,-9.889 P2.1
NetP2_2: P2.2 U3.9 | length 3
  Component Side w0.3: U3.9@0.5,-9.65 0.5,-10.149 0.726,-10.375 2.547,-10.375 P2.2
NetP3_1: P3.1 U3.6 | length 3.5
  Component Side w0.3: P3.1 -3.617,-9.889 -1,-9.889 U3.6
NetP3_2: P3.2 U3.7 | length 3
  Component Side w0.3: P3.2 -2.547,-10.375 -0.726,-10.375 -0.5,-10.149 U3.7@-0.5,-9.65
NetR4_2: R4.2 U1.44 | length 1.4
  Solder Side w0.15: U1.44 6.84,-1.62 6.935,-1.715 6.935,-1.747 7.478,-2.29 R4.2@7.66,-2.29
NetR7_1: R7.1 U2.4 | length 1
  Solder Side w0.15: U2.4 -5.555,-1.47 -5.555,-0.925 R7.1
NetR10_1: R10.1 U2.3 | length 0.9
  Solder Side w0.15: U2.3 R10.1
NetR12_1: R12.1 U2.2 | length 1
  Solder Side w0.15: R12.1 -6.505,-0.925 -6.505,-1.47 U2.2
NetR14_1: R14.1 R22.2 R23.2 U7.4 | length 5.6
  Component Side w0.15: R23.2@7.61,-2.59 7.661,-2.59 8.176,-2.075 9.075,-2.075 9.36,-2.36 R14.1 9.628,-2.36 10.378,-3.11 v1(10.51,-3.11)
  Solder Side w0.15: U7.4 9.75,-1.9 10.069,-2.219 10.069,-2.669 v1(10.51,-3.11)
NetR16_1: R16.1 R20.2 U6.2 | length 3.4
  Solder Side w0.15: R20.2 R16.1 8.8,4.89 9.76,3.93 U6.2
NetR25_1: R25.1 U8.5 | length 3.3
  Component Side w0.2: R25.1 -7.12,-5.99 -6.57,-5.44 -6.57,-4.93 U8.5
NetR26_1: R26.1 R32.2 R33.2 U10.4 | length 3.7
  Component Side w0.15: R32.2@-10.54,-2.53 R33.2@-9.87,-2.53 ; R33.2 -9.84,-2.648 -9.09,-3.398 R26.1
  Solder Side w0.15: v1@-10.56,-2.53 -10.56,-2.698 -9.835,-3.423 -9.835,-3.593 -9.65,-3.778 U10.4
  other v1: -10.63,-2.53
NetR29_1: R29.1 R30.2 U9.2 | length 4.3
  Component Side w0.15: v1(-10.4,2.5) -9.64,2.5 ; -9.64,2.5 R30.2 ; R30.2 R29.1
  Solder Side w0.15: v1(-10.4,2.5) -10.4,2.11 -9.605,1.315 -9.605,1.203 -9.31,0.908 U9.2
NetR37_2: R37.2 U11.16 | length 2.3
  Component Side w0.15: R37.2@-2.875,4.4 -2.875,4.1 -2.265,3.49 -2.265,2.9 -2.14,2.775 U11.16
NRST: C6.2 R2.1 R5.1 U1.7 | length 7.7
  Component Side w0.15: v1(2.59,-5.16) R5.1@3.52,-5.16 ; R5.1@3.54,-5.16 3.64,-5.16 3.67,-5.19 3.68,-5.18 C6.2 4.27,-4.72 4.445,-4.545 4.445,-3.115 6.21,-1.35 R2.1
  Solder Side w0.15: v1(2.59,-5.16) 2.85,-4.9 U1.7
PHOTODIODE_1: R23.1 U1.46 U7.6 | length 5.3
  Component Side w0.15: v1(8.58,-2.62) 8.58,-2.64 R23.1@8.61,-2.67 ; R23.1@8.61,-2.59 R23.1@8.61,-2.67 ; R23.1@8.61,-2.67 8.64,-2.7 8.63,-2.71 8.61,-2.69 R23.1@8.61,-2.67
  Solder Side w0.15: U1.46 6.94,-2.62 7.125,-2.805 7.125,-3.823 7.307,-4.005 8.145,-4.005 8.57,-3.58 8.57,-2.384 8.55,-2.364 8.55,-2.35 8.45,-2.25 U7.6@8.45,-1.94
PHOTODIODE_2: R33.1 U1.19 U10.6 | length 21.1
  Component Side w0.15: R33.1 -9.84,-4.09 -9.63,-4.3 v1(-9.63,-5.52)
  Solder Side w0.15: v1(-9.63,-5.52) -8.515,-5.52 ; U10.6 -8.62,-3.92 -8.515,-4.025 -8.515,-5.52 ; U1.19 -0.355,-0.615 -0.795,-0.615 -1.735,0.325 -2.974,0.325 -3.282,0.017 -3.282,-0.417 -3.204,-0.495 -2.974,-0.725 -2.967,-0.725 -2.42,-1.272 -2.42,-5.148 -3.022,-5.75 -3.981,-5.75 -4.126,-5.895 -5.248,-5.895 -5.678,-6.325 -6.465,-6.325 -6.915,-5.875 -8.365,-5.875 -8.515,-5.725 -8.515,-5.52
RADIO_CE: U1.18 U11.1 | length 5.1
  Component Side w0.15: v1(-2.757,-0.2) -2.66,-0.2 -2.705,-0.155 -0.87,-0.155 U11.1 U11.1@-0.825,-0.44
  Solder Side w0.15: v1(-2.757,-0.2) -1.728,-0.2 -0.808,-1.12 U1.18 U1.18@-0.32,-1.12
RADIO_CLK: U1.29 U11.10 | length 2.2
  Component Side w0.15: v1(1.82,3.49) 2.15,3.16 U11.10
  Solder Side w0.15: v1(1.82,3.49) 2.18,3.49 2.35,3.32 U1.29
RADIO_IRQ: U1.38 U11.6 | length 16.3
  Component Side w0.15: U11.6 2.15,-0.47 1.815,-0.805 1.815,-4.273 1.947,-4.405 3.309,-4.405 4.145,-3.569 4.145,-2.985 5.73,-1.4 5.73,0.77 6.62,1.66 v1(7.38,1.66)
  Solder Side w0.15: U1.38 7.09,1.38 ; 7.09,1.38 7.1,1.38 v1(7.38,1.66) 7.38,1.67 7.09,1.38
RADIO_SPI.CSN: U1.14 U11.2 | length 7.5
  Component Side w0.15: v1(-1.87,-3.43) -2.673,-2.627 -2.673,-1.006 -2.182,-0.515 -1.498,-0.515 -1.263,-0.75 -0.54,-0.75 -0.325,-0.535 U11.2
  Solder Side w0.15: v1(-1.87,-3.43) -1.33,-3.43 -1.02,-3.12 U1.14
RADIO_SPI.MISO: U1.16 U11.5 | length 11.7
  Component Side w0.15: v1@-1.365,-1.98 -1.365,-1.974 v1@-1.36,-1.969 ; U11.5 1.175,-4.187 0.657,-4.705 -0.068,-4.705 -0.628,-5.265 -1.312,-5.265 -1.795,-4.782 -1.795,-4.097 -1.345,-3.647 -1.345,-1.995 v1(-1.36,-1.98) v1@-1.36,-1.969 ; v1@-1.36,-1.969 -1.36,-1.949 -1.35,-1.959 v1@-1.36,-1.969
  Solder Side w0.15: v1(-1.36,-1.98) -0.92,-1.98 -0.78,-2.12 U1.16
RADIO_SPI.MOSI: U1.17 U11.4 | length 12.7
  Component Side w0.15: v1(-1.84,-1.34) -1.83,-1.35 -1.07,-1.35 -0.835,-1.585 -0.835,-2.173 -0.835,-3.563 -1.495,-4.223 -1.495,-4.657 -1.187,-4.965 -0.753,-4.965 -0.193,-4.405 0.533,-4.405 0.675,-4.263 U11.4
  Solder Side w0.15: v1(-1.84,-1.34) -1.09,-1.34 -0.81,-1.62 U1.17 U1.17@-0.36,-1.61
RADIO_SPI.SCK: U1.15 U11.3 | length 6.6
  Component Side w0.15: v1(-1.87,-2.61) -2.365,-2.115 -2.365,-1.123 -2.057,-0.815 -1.623,-0.815 -1.388,-1.05 -0.19,-1.05 0.175,-0.685 U11.3
  Solder Side w0.15: v1(-1.87,-2.61) -0.36,-2.61 U1.15 U1.15@-0.32,-2.62
RGBLED1: R18.1 U1.31 | length 9
  Component Side w0.15: v1(3.63,5.43) 3.615,5.415 3.615,3.957 4.489,3.084 R18.1@4.489,-0.01
  Solder Side w0.15: U1.31 3.35,2.818 3.835,3.303 3.835,3.737 3.615,3.957 3.615,5.415 v1(3.63,5.43)
RGBLED2: R17.1 U1.32 | length 6.1
  Component Side w0.15: R17.1@5.26,-0.01 5.26,1.138 5.035,1.363 5.035,1.797 5.3,2.062 v1(5.3,3.73)
  Solder Side w0.15: U1.32 3.85,2.893 4.197,3.24 4.52,3.24 5.01,3.73 v1(5.3,3.73)
RGBLED3: R19.1 U1.30 | length 4.9
  Component Side w0.15: v1@3.19,3.53 3.725,2.995 R19.1@3.725,-0.01
  Solder Side w0.15: U1.30 2.85,3.05 3.31,3.51 v1(3.31,3.52)
SWCLK: R3.1 U1.37 | length 2
  Solder Side w0.15: U1.37 6.858,1.88 7.163,2.185 7.665,2.185 8.03,2.55 R3.1@8.03,2.82
SWDIO: R1.1 U1.34 | length 3
  Solder Side w0.15: U1.34 4.85,3 5.04,3.19 6.79,3.19 R1.1@7.16,2.82
T\O\U\C\H\_\C\H\G\: R8.1 U1.20 U2.14 | length 14.9
  Solder Side w0.15: U2.14 -6.48,-4.988 -6.545,-5.053 -6.545,-5.717 -6.237,-6.025 -5.803,-6.025 -5.373,-5.595 -4.25,-5.595 -4.105,-5.45 -3.184,-5.45 -2.95,-5.216 R8.1 -2.95,-4.18 -2.72,-3.95 -2.72,-1.397 -3.092,-1.025 -3.098,-1.025 -3.328,-0.795 -3.582,-0.542 -3.582,0.142 -3.098,0.625 -1.611,0.625 -0.866,-0.12 U1.20
VBAT: C14.2 C19.2 J2.1 U1.1 U5.4 U5.6 U8.3 | length 29.5
  Component Side w0.3: U5.4@-4.95,-8.13 v1(-4.95,-9.12) -3.66,-9.12 -3.65,-9.13 -3.65,-8.165 -3.65,-8.475
  Solder Side w0.15: v1(-4.95,-9.12) -4.945,-9.125 -3.185,-9.125 -2.465,-9.845 3.197,-9.845 3.702,-9.34 4.537,-9.34 4.642,-9.445 5.077,-9.445 5.385,-9.138 5.385,-8.295 5.51,-8.17 7.288,-8.17 7.585,-7.873 7.585,-6.087 7.453,-5.955 7.105,-5.955 6.885,-5.735 6.885,-5.092 6.743,-4.95 6,-4.95 5.85,-4.8 U1.1 U1.1@5.88,-4.35
  Solder Side w0.3: v1(-8.72,-6.58) -7.88,-6.58 C19.2 ; C19.2@-7.72,-6.8 -6.67,-6.8 ; J2.1@-5.588,-6.8 -6.67,-6.8 ; v1(-4.95,-9.12) -5.88,-9.12 -5.885,-9.125 -6.67,-8.34 -6.67,-6.8
VDD_PA: B1.5 C27.2 U11.11 | length 2.4
  Component Side w0.254: B1.5 1.76,5 1.76,4.618 1.24,4.098 1.175,4.098 U11.11
pads on no net: B1.6 J1.4 J1.5 J2.3 J2.4 P1. P1.6 U1.2 U1.3 U1.4 U1.27 U1.28 U1.33 U1.35 U1.36 U1.39 U1.45 U2.1 U2.5 U2.6 U2.7 U2.10 U2.16 U2.17 U2.18 U2.19 U2.20 U4.9 U4.10 U4.11 U6.3 U7.2 U9.3 U10.2 U11.9

## Polygon pours and split planes (outlines as drawn)
GND on Solder Side "Bottom Ground Plane" (solid, remove dead copper, pour order 4): -11.97,-0.848 ccw(c0,0) 11.97,-0.848 cw(c12.5,0) 11.97,0.848 ccw(c0,0) -11.97,0.848 cw(c-12.5,0)
GND on Component Side "Bottom Ground Plane" (solid, remove dead copper, pour order 3): -11.97,-0.848 ccw(c0,0) 11.97,-0.848 cw(c12.5,0) 11.97,0.848 ccw(c0,0) -11.97,0.848 cw(c-12.5,0)
GND on Ground Plane (split plane): 164 vertices, not listed, extent -11.44,-11.492 11.44,10.967
+3.3V on Power Plane (split plane): 164 vertices, not listed, extent -11.44,-11.492 11.44,10.967

## Keep-outs
Keep-Out Layer:
  pour cut-out: 4.575,7.6 4.575,12.211 -3.425,12.211 -3.425,7.6

## Other copper
Component Side:
  rectangle net GND: 0.575,8.9 1.175,11
  rectangle net GND: 1.175,10.4 4.675,11
  rectangle net GND: -3.675,10.25 -3.425,11.445
Ground Plane (plane layer: these items are gaps in the copper):
  pour cut-out: -4.73,1.325 -4.73,3.38 -7.65,6.3 -9.58,6.3 -9.58,3.02 -7.6,3.02 -7.6,1.325
  pour cut-out: 4.575,7.6 4.575,12.2 -3.425,12.2 -3.425,7.6
Power Plane (plane layer: these items are gaps in the copper):
  pour cut-out: 4.575,7.6 4.575,12.211 -3.425,12.211 -3.425,7.6
  pour cut-out: -4.73,1.325 -4.73,3.38 -7.65,6.3 -9.58,6.3 -9.58,3.02 -7.6,3.02 -7.6,1.325

## Silkscreen, mask and mechanical layers (free items; w line width, h text height)
Board Outline:
  lines w0.254: -11.999,-0.85 ccw(c-12.5,0) -11.998,0.85 cw(c0,0) 11.998,0.852 ; -11.998,-0.852 ccw(c0,0) 11.998,-0.85 cw(c12.5,0) 11.999,0.85
Mechanical 10:
  the board outline again, w0.1